# EAGLE board driver ckt - Copy (EAGLE 8.4.3)
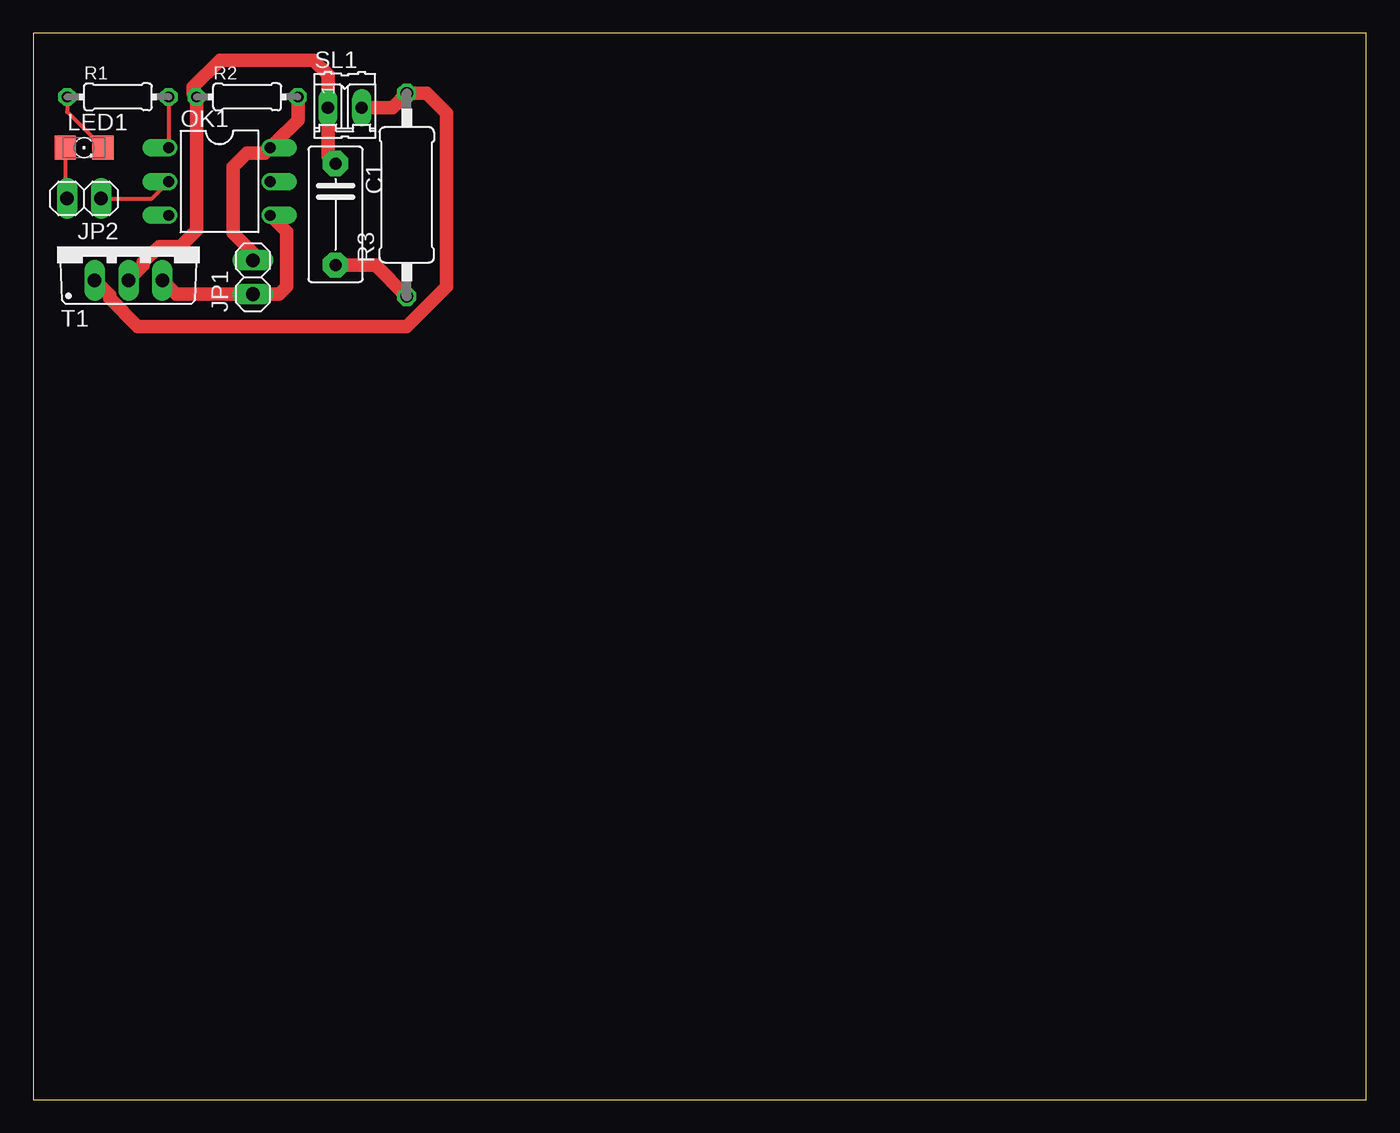
[diagram p0: board, top side]

Size 100 x 80 mm. Coordinates in mm from the lower left corner, seen from the top.
Outline: 0,0 100,0 100,80 0,80 0,0
Copper layers (1*16): Top 0.035mm / dielectric 1.5mm / Bottom 0.035mm
Design rules "default": minimum track width 6mil, minimum drill 0.35mm, track to track 6mil, track to pad 6mil, pad to pad 6mil, via to via 6mil, smd to smd 6mil, copper to edge 40mil, drill to drill 6mil, minimum pad ring 10mil, minimum via ring 8mil, stop-mask expansion 4mil, vias tented up to drill 0mil, thermal gap 10mil

## Footprints (pad centres in the part's own frame; a part is rotated, then mirrored left to right if it is on the bottom)
C7.5B4 = drill 0.914 pad 1.905 octagon: 1 -3.81,0; 2 3.81,0
1X02 = drill 1.016 long: 1 -1.27,0; 2 1.27,0
LED_1206 = smd 1.6 x 1.803: A -1.422,0; C 1.422,0
DIL06 = drill 0.813 offset: 1 -2.54,-3.81; 2 0,-3.81; 3 2.54,-3.81; 4 2.54,3.81; 5 0,3.81; 6 -2.54,3.81
0204/7 = drill 0.813 octagon: 1 -3.81,0; 2 3.81,0
0411/15 = drill 0.914 octagon: 1 -7.62,0; 2 7.62,0
02P = drill 0.914 long: 1 -1.27,0; 2 1.27,0
TO220BV = drill 1.016 long: G 2.54,-2.54; T1 -2.54,-2.54; T2 0,-2.54

## Placement (x,y rotation side)
C1  [C7.5B4]  22.67,66.42 270 top
JP1  [1X02]  16.47,61.7 90 top
JP2  [1X02]  3.81,67.61 180 top
LED1  [LED_1206]  3.81,71.42 0 top
OK1  MOC3011M  [DIL06]  13.97,68.88 270 top
R1  [0204/7]  6.35,75.23 0 top
R2  [0204/7]  16.05,75.23 0 top
R3  [0411/15]  28.02,67.88 90 top
SL1  [02P]  23.37,74.42 0 top
T1  BT138-V  [TO220BV]  7.14,64.01 0 top

## Library data of the parts
C1 = capacitor-wima
JP1 JP2 = pinhead
LED1 = eagle-ltspice; SPICEMODEL: NONE; SPICEPREFIX: D; SPICETYPE: diode
OK1 = optocoupler; MF: FAIRCHILD SEMICONDUCTOR; MPN: MOC3011-M; OC_FARNELL: 1021363; OC_NEWARK: 72K8893
R1 R2 = eagle-ltspice; SPICEMODEL: NONE; SPICEPREFIX: R
R3 = resistor
SL1 = con-amp-quick; OC_FARNELL: unknown; OC_NEWARK: unknown
T1 = triac

## Nets
N$1: LED1.C R1.1
N$2: OK1.1 R1.2
N$3: JP2.2 LED1.A
N$4: JP2.1 OK1.2
N$5: JP1.2 OK1.6 R2.2
N$7: JP1.1 OK1.4 T1.G
N$8: R3.2 SL1.2 T1.T1
N$9: C1.2 R3.1
N$10: C1.1 R2.1 SL1.1 T1.T2

## Tracks (layer width: path | path; a pad name or v marks a point on that pad's centre or on a via)
N$1
  Top 0.305: R1.1 2.54,74.11 LED1.C
N$2
  Top 0.305: R1.2 OK1.1
N$3
  Top 0.305: LED1.A 2.39,67.76 JP2.2
N$4
  Top 0.305: JP2.1 8.89,67.61 OK1.2
N$5
  Top 1.016: R2.2 19.86,73.5 18.18,71.82 OK1.6 17.36,71 16,71 15,70 15,65 16.47,63.53 JP1.2
N$7
  Top 1.016: T1.G 10.72,60.43 JP1.1 18.43,60.43 19,61 19,65.12 OK1.4
N$8
  Top 1.016: SL1.2 26.94,74.42 R3.2 29.5,75.5 31,74 31,61 28,58 7.84,58 5.72,60.12 5.72,60.35 T1.T1
N$9
  Top 1.016: C1.2 25.67,62.61 R3.1
N$10
  Top 1.016: T1.T2 8.26,62.59 8.26,62.82 9.44,64 11,64 12.24,65.24 R2.1 12,75.47 12,76 14,78 21,78 22.1,76.9 SL1.1 22.1,70.8 C1.1

## Text on the board
_tNames: R1 | R2 | SL1 | LED1 | OK1 | C1 | JP2 | R3 | JP1 | T1